# Altium PCB 液晶屏电子琴.PcbDoc
Units mil, origin at the board's own origin, x right, y up, seen from the top; angles counter-clockwise.
Board outline 6000 x 4000 mil, 2 copper layers (Top Layer, Bottom Layer); 28 components, 33 nets, 140 pads, 0 vias.
Unrouted connection lines stored in the file: 10.
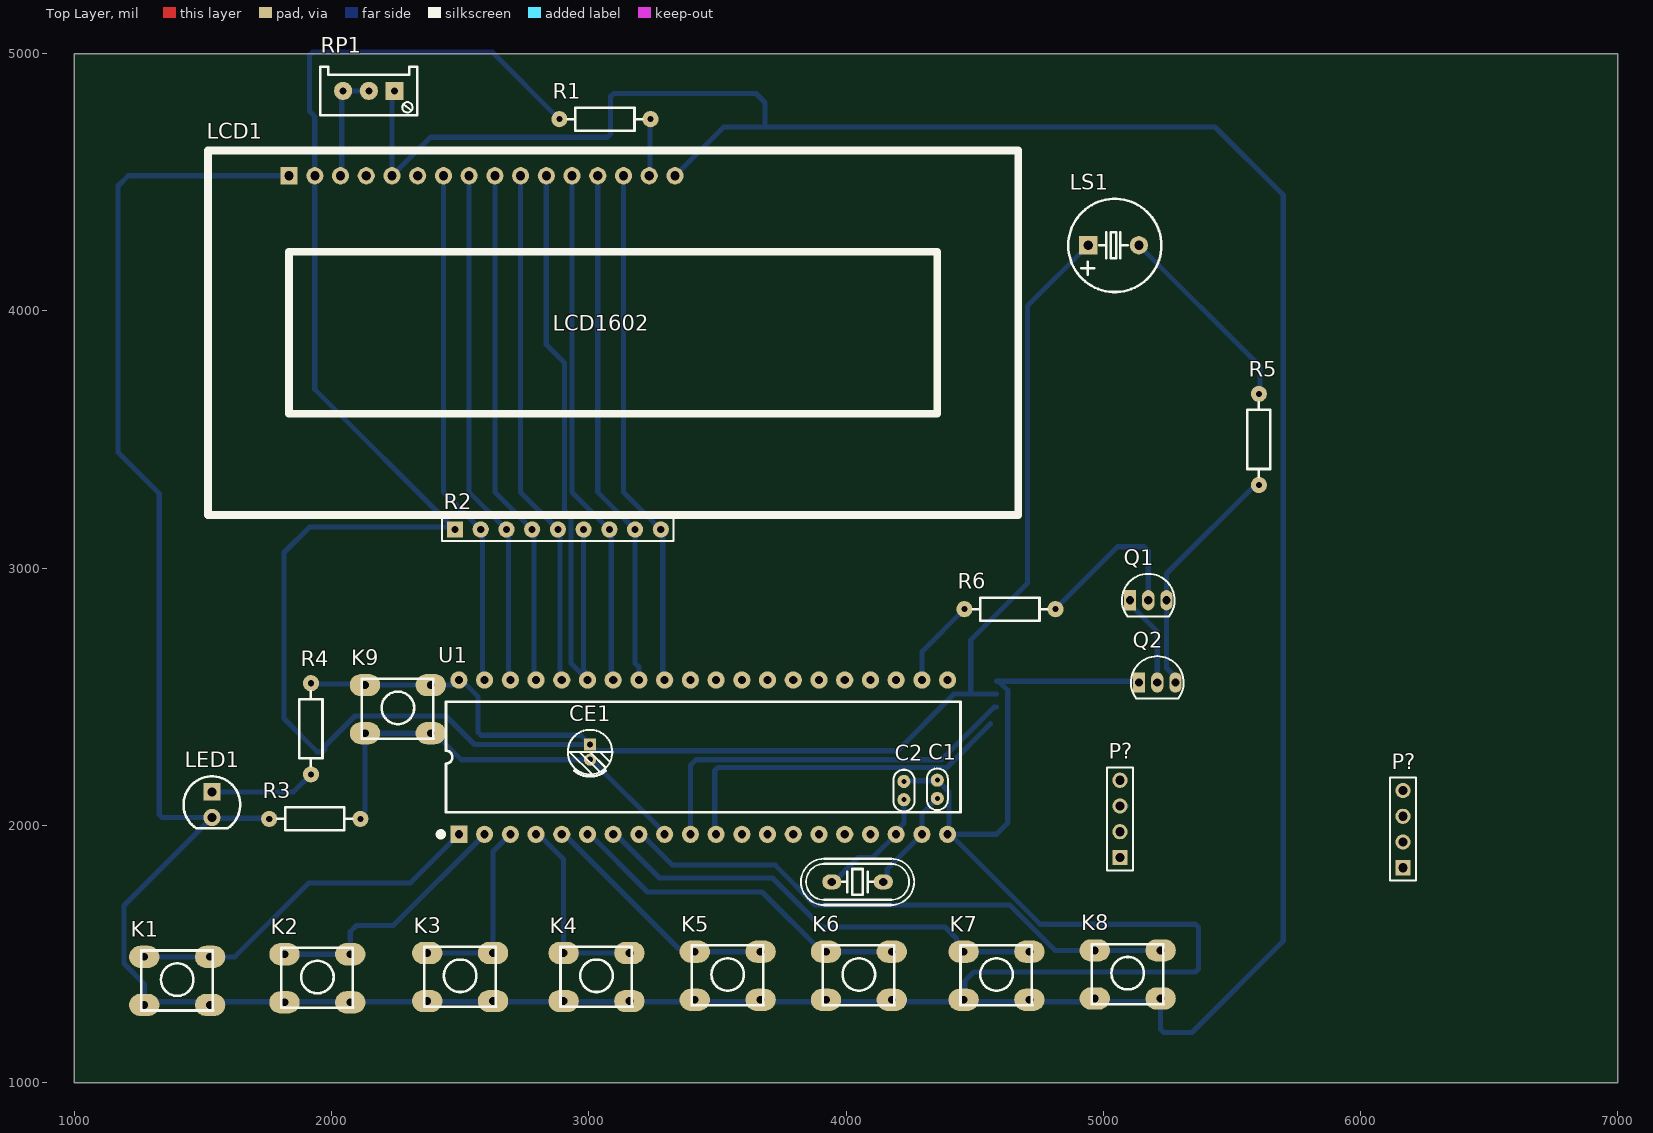
[diagram p0: Top Layer view]
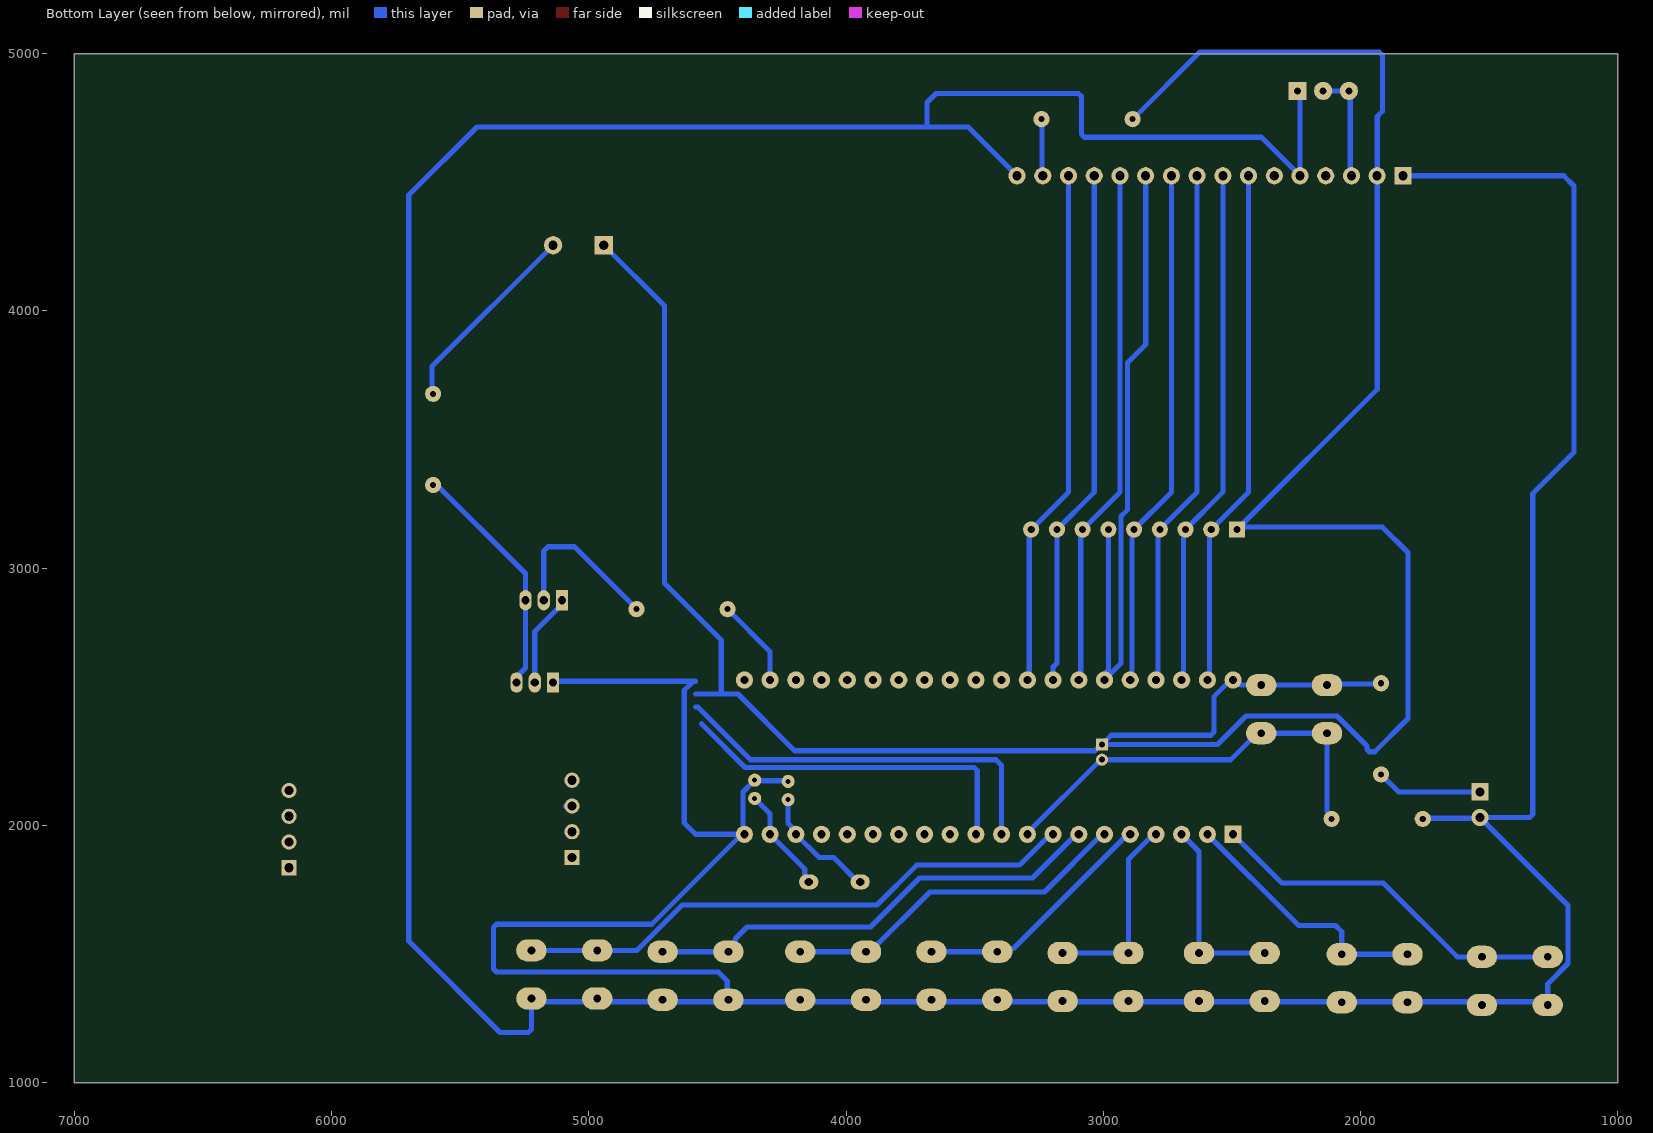
[diagram p1: Bottom Layer view, seen from below]
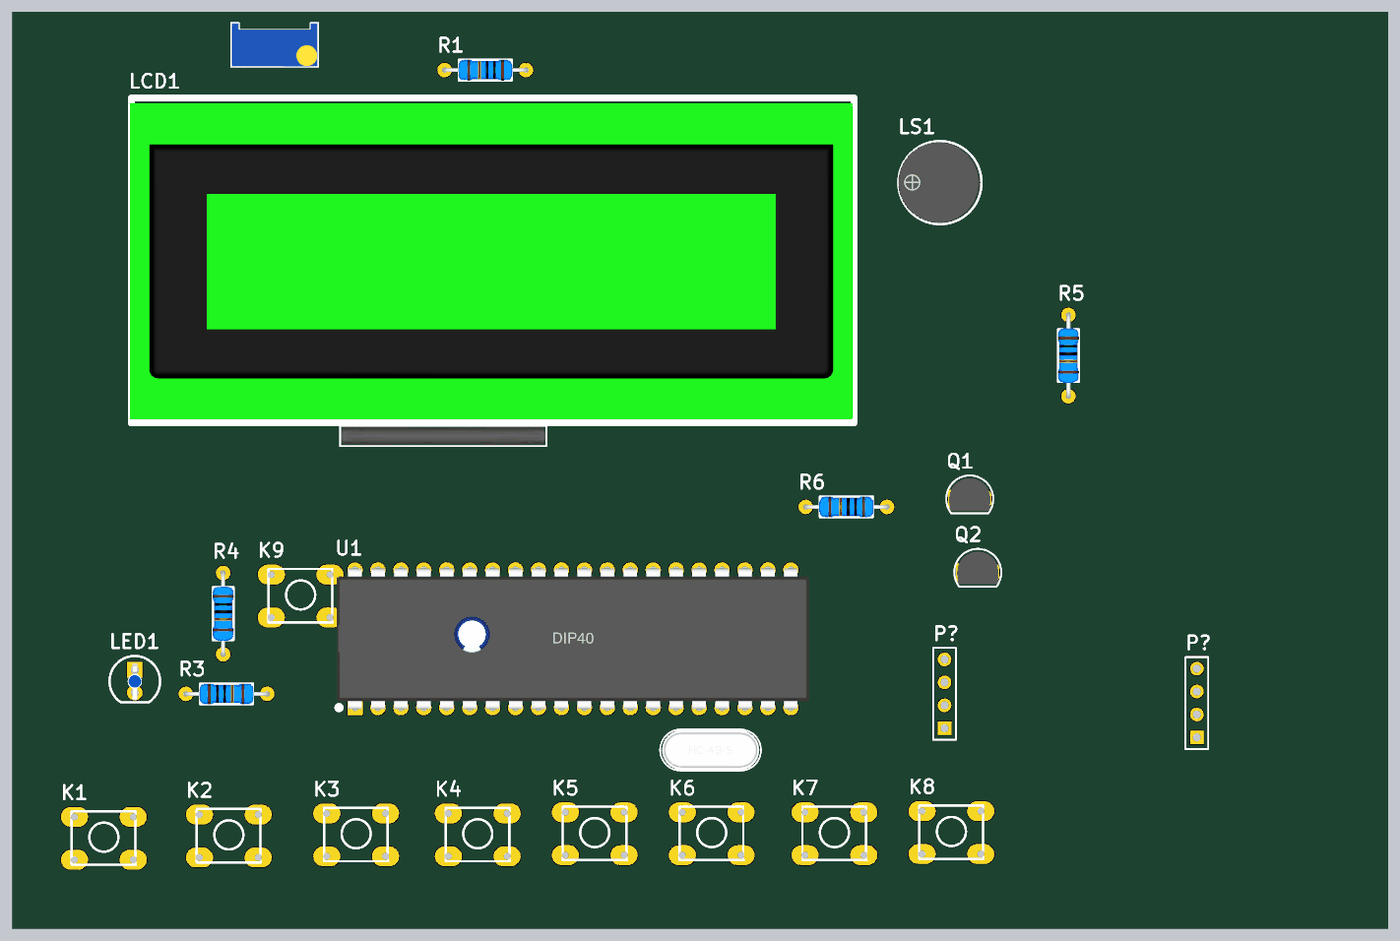
[diagram p2: 3D render of the assembled board from above, using the file's embedded part models]

## Layer stack, top to bottom
Top Solder: solder mask 0.4, Solder Resist, Dk 3.5
Top Layer: signal copper 1.4
Dielectric 1: dielectric 12.6, FR-4, Dk 4.8
Bottom Layer: signal copper 1.4
Bottom Solder: solder mask 0.4, Solder Resist, Dk 3.5

## Board outline
1000,1000 7000,1000 7000,5000 1000,5000

## Design rules (kind name [scope] priority, off if disabled: settings)
Clearance [All] p1: gap=10 ignorepadtopadclearanceinfootprint=FALSE except(0: Arc-Hole Track-Hole SMDPad-Hole THPad-Hole Via-Hole Fill-Hole Poly-Hole Region-Hole Text-Hole)
PolygonConnect [All] p1: connectstyle=Relief reliefconductorwidth=10 reliefentries=4 polygonreliefangle="90 Angle" airgapwidth=10
RoutingVias [All] p1: holewidth=28 width=50 viastyle="Through Hole" minholewidth=28 minwidth=50 maxholewidth=28 maxwidth=50
SolderMaskExpansion [All] p1: expansion=4 istentingtop=FALSE
Width [All] p1: maxlimit=20 minlimit=20 preferedwidth=20 minimp=50.000000 maximp=50.000000 favimp=50.000000
30 further rules are at their usual default settings.

## Classes and differential pairs
component class 液晶屏电子琴: C1 C2 CE1 K1 K2 K3 K4 K5 K6 K7 K8 K9 LCD1 LED1 LS1 P? Q1 Q2 R1 R2 R3 R4 R5 R6 RP1

## Components (designator, comment, footprint, x,y, rotation, side; value= is the part's Value field where it differs from the comment)
C1 "30" "CC 1.8*3.6" 4355,2140 r270 top
C2 "30" "CC 1.8*3.6" 4225,2135 r270 top
CE1 "10uF/16V" "CAP 1.5*4*8" 3005,2284.53 r270 top
K1 "KEY" SW1 1400,1400 r0 top
K2 "KEY" SW1 1945,1410 r0 top
K3 "KEY" SW1 2500,1415 r0 top
K4 "KEY" SW1 3030,1415 r0 top
K5 "KEY" SW1 3540,1420 r0 top
K6 "KEY" SW1 4050,1420 r0 top
K7 "KEY" SW1 4585,1420 r0 top
K8 "KEY" SW1 5095,1425 r0 top
K9 "KEY" SW1 2257.95,2456.42 r0 top
LCD1 "LCD 1602" LCD-1602 1835,4525 r0 top
LED1 "红色" "LED 5MM-B" 1535,2080 r270 top
LS1 "DC5V" "BEEP 5x9x5.5" 5040,4255 r270 top
P? "Header 4" HDR1X4 5065,1875 r90 top
P? "Header 4" HDR1X4 6165,1835 r90 top
Q1 "SS8050" TO92A 5175,2875 r270 top
Q2 "SS8050" TO92A 5210,2555 r270 top
R1 "10K" "RS 1/4W" 3062.83,4745 r180 top
R2 "103" "R SIP9-2.54" 2880,3150 r0 top
R3 "1K" "RS 1/4W" 1935,2025 r0 top
R4 "1K" "RS 1/4W" 1920,2375 r270 top
R5 "30" "RS 1/4W" 5605,3500 r270 top
R6 "10K" "RS 1/4W" 4637.17,2840 r180 top
RP1 "10K" 3296W 2145,4855 r180 top
U1 "STC89C52RC" DIP40-600 3445,2265 r90 top
? "12.0000M" HC-49S 3945,1780 r0 top

## Footprints (in the part's own frame and the unit in brackets; to place one, negate y for a bottom-side part, rotate by r counter-clockwise, add the part's x,y. Pads: shape width x height; smd on the part's side, far side on the other; paste and mask are expansions set on the pad)
3296W [mm] "Precise Multi-Winding Adjustable Resistor"
  rect 1.8x1.8 hole 0.7: 1(-2.54,0)
  round 1.8 hole 0.7: 2(0,0) 3(2.54,0)
  silkscreen extent -4.8,-2.4 4.8,2.4, body extent -4.75,-2.4 4.75,2.4, height 11.52
"BEEP 5x9x5.5" [mm] "5*9*5.5mm(脚距,直径,高度)"
  rect 1.8x1.8 hole 0.9: 1(0,-2.5)
  round 1.8 hole 0.9: 2(0,2.5)
  silkscreen extent -4.57,-4.47 4.62,4.73, body extent -4.5,-4.5 4.5,4.5, height 5.45
"CAP 1.5*4*8" [mm] "脚距1.5mm直径4mm高度8mm"
  rect 1.2x1.2 hole 0.6: 1(-0.75,0)
  round 1.2 hole 0.6: 2(0.75,0)
  silkscreen extent -2.2,-2.2 2.41,2.2, body extent -2,-2 2.02,2, height 8.04
"CC 1.8*3.6" [mm] "脚距1.8mm直径3.6mm"
  round 1.3 hole 0.5: 1(-0.9,0) 2(0.9,0)
  silkscreen extent -2.05,-1.04 2.05,1.04, body extent -1.8,-0.8 1.8,0.8, height 3.6
DIP40-600 [mm] "52*15.2*4mm(长宽高)"
  rect 1.7x1.7 hole 0.8: 1(-7.62,24.13)
  round 1.7 hole 0.8: 2(-7.62,21.59) 3(-7.62,19.05) 4(-7.62,16.51) 5(-7.62,13.97) 6(-7.62,11.43) 7(-7.62,8.89) 8(-7.62,6.35) 9(-7.62,3.81) 10(-7.62,1.27) 11(-7.62,-1.27) 12(-7.62,-3.81) 13(-7.62,-6.35) 14(-7.62,-8.89) 15(-7.62,-11.43) 16(-7.62,-13.97) 17(-7.62,-16.51) 18(-7.62,-19.05) 19(-7.62,-21.59) 20(-7.62,-24.13) 21(7.62,-24.13) 22(7.62,-21.59) 23(7.62,-19.05) 24(7.62,-16.51) 25(7.62,-13.97) 26(7.62,-11.43) 27(7.62,-8.89) 28(7.62,-6.35) 29(7.62,-3.81) 30(7.62,-1.27) 31(7.62,1.27) 32(7.62,3.81) 33(7.62,6.35) 34(7.62,8.89) 35(7.62,11.43) 36(7.62,13.97) 37(7.62,16.51) 38(7.62,19.05) 39(7.62,21.59) 40(7.62,24.13)
  silkscreen extent -7.87,-25.4 5.46,26.16, body extent -7.78,-26.18 7.78,26.18, height 4.7
HC-49S [mil]
  oval 75x59.06 hole 32: 1(0,0) 2(200,0)
  silkscreen extent -120,-90 320,90, body extent -112,-89 313,88, height 138
HDR1X4 [mm] "Connector; Header; 4 Position"
  rect 1.5x1.5 hole 0.9: 1(0,0)
  round 1.5 hole 0.9: 2(2.54,0) 3(5.08,0) 4(7.62,0)
  silkscreen extent -1.27,-1.27 8.89,1.27
LCD-1602 [mm] "LCD module 16*2 char                    @sucaita.com 素材塔"
  rect 1.7x1.7 hole 0.9: 1(0,0)
  round 1.7 hole 0.9: 2(2.54,0) 3(5.08,0) 4(7.62,0) 5(10.16,0) 6(12.7,0) 7(15.24,0) 8(17.78,0) 9(20.32,0) 10(22.86,0) 11(25.4,0) 12(27.94,0) 13(30.48,0) 14(33.02,0) 15(35.56,0) 16(38.1,0)
  silkscreen extent -8,-33.5 72,2.5, body extent -8.15,-33.11 71.85,1.89, height 9
"LED 5MM-B" [mm] "蓝色5mm直插LED"
  rect 1.7x1.7 hole 0.9: 1(-1.27,0)
  round 1.7 hole 0.9: 2(1.27,0)
  silkscreen extent -2.8,-2.8 2.33,2.8, body extent -2.85,-2.85 2.45,2.85, height 8.75
"R SIP9-2.54" [mm] "22.6mm*5mm*2.2mm(长*宽*厚)"
  rect 1.6x1.6 hole 0.7: 1(-10.16,0)
  round 1.6 hole 0.7: 2(-7.62,0) 3(-5.08,0) 4(-2.54,0) 5(0,0) 6(2.54,0) 7(5.08,0) 8(7.62,0) 9(10.16,0)
  silkscreen extent -11.43,-1.14 11.43,1.14, body extent -11.31,-0.96 11.31,0.96, height 5.2
"RS 1/4W" [mm] "直插色环电阻，脚距9mm，直径2.3mm                    @sucaita.com 素材塔"
  round 1.6 hole 0.6: 1(-4.5,0) 2(4.5,0)
  silkscreen extent -3.68,-1.14 3.68,1.14, body extent -4.72,-1.16 4.73,1.16, height 2.32
SW1 [mm]
  oval 2.999x2.2 hole 0.762: 1(-3.25,-2.5) 1(3.25,-2.5) 2(-3.25,2.25) 2(3.25,2.25)
  silkscreen extent -3.55,-3.05 3.56,2.88
TO92A [mm] "92晶体管                    @sucaita.com 素材塔"
  rect 2x1.2 hole 0.8: 1(0,-1.8)
  oval 2x1.2 hole 0.8: 2(0,0) 3(0,1.8)
  silkscreen extent -2.6,-2.6 1.6,2.6, body extent -2.3,-2.3 1.3,2.3, height 7.6

## Part data
C1 C2: library part CC, "瓷片电容", BOM名称=直插瓷片电容, 封装库来自淘宝卖家 ID：黄晶宝石=其他店铺购入均为盗版，不享受售后技术支持服务，请立即申请退款, 淘宝ID="封装库来自淘宝 ID：黄晶宝石", 联系售后=https://shop463601444.taobao.com
CE1: library part CE, "直插电解电容", BOM名称=直插电解电容, 淘宝ID="封装库来自淘宝 ID：黄晶宝石", 联系售后=https://shop463601444.taobao.com
LED1: library part LED-5MM, "直插5mm LED", BOM名称=5mm插件LED, 学习资源=https://shop463601444.taobao.com, 版权归属="封装库来自淘宝 ID：黄晶宝石"
LS1: library part BEEP, "蜂鸣器", BOM名称=蜂鸣器, 技术支持，联系售后=https://shop463601444.taobao.com, 版权归属="封装库来自淘宝 ID：黄晶宝石"
P? P?: "Header, 4-Pin", LatestRevisionDate=17-Jul-2002, LatestRevisionNote="Re-released for DXP Platform.", Publisher="Altium Limited"
Q1 Q2: library part 8050-DIP, "高频放大-NPN型", BOM名称=高频放大-NPN型, 属性="40V 1.5A 1W 100MHZ", 技术支持，联系售后=https://shop463601444.taobao.com, 版权归属="封装库来自淘宝 ID：黄晶宝石"
R1 R3 R4 R5 R6: library part R-S, "色环电阻", BOM名称=色环电阻, 版权归属="封装库来自淘宝 ID：黄晶宝石", 联系售后=https://shop463601444.taobao.com
R2: library part "R SIP9", "9脚直插排阻", BOM名称=单列直插排阻, 淘宝ID="封装库来自淘宝 ID：黄晶宝石", 联系售后=https://shop463601444.taobao.com
RP1: library part RP, "单联电位器", BOM名称=插件电位器, 版权归属="封装库来自淘宝 ID：黄晶宝石", 联系售后=https://shop463601444.taobao.com
U1: "STC单片机", BOM名称=STC单片机, 学习资源=https://shop463601444.taobao.com, 版权归属="封装库来自淘宝 ID：黄晶宝石"
?: library part XT, "晶振"
LCD1: BOM名称="LCD 1602", 技术支持，联系售后=https://shop463601444.taobao.com, 版权归属="封装库来自淘宝 ID：黄晶宝石"

## Nets (pads, with @x,y where several pads share a name; then routed paths per layer and width w, separated by ;. In a path a pad name is that pad's centre, name@x,y a point inside that pad or via, vN(x,y) a via of type N, cw(c..) or ccw(c..) an arc to the next point about the centre after c; other vN are vias at no path point)
DB0: LCD1.7 R2.2 U1.39 | length 2026.3
  Bottom Layer w20: LCD1.7 2435,3295 R2.2 2587.5,3142.5 2587.5,2572.5 U1.39
DB1: LCD1.8 R2.3 U1.38 | length 2026.3
  Bottom Layer w20: LCD1.8 2535,3295 R2.3 2687.5,3142.5 2687.5,2572.5 U1.38
DB2: LCD1.9 R2.4 U1.37 | length 2026.3
  Bottom Layer w20: LCD1.9 2635,3295 R2.4 2787.5,3142.5 2787.5,2572.5 U1.37
DB3: LCD1.10 R2.5 U1.36 | length 2026.3
  Bottom Layer w20: LCD1.10 2735,3295 R2.5 2887.5,3142.5 2887.5,2572.5 U1.36
DB4: LCD1.11 R2.6 U1.35 | length 2604.8
  Bottom Layer w20: LCD1.11 2835,3868.73 2905,3798.73 2905,3226.87 2931.5,3200.37 2931.5,2628.5 U1.35@2986.02,2573.98 ; R2.6 2980,2605 2986.02,2598.98 U1.35@2986.02,2573.98 ; U1.35 U1.35@2986.02,2573.98
DB5: LCD1.12 R2.7 U1.34 | length 2026.3
  Bottom Layer w20: LCD1.12 2935,3295 R2.7 3087.5,3142.5 3087.5,2572.5 U1.34
DB6: LCD1.13 R2.8 U1.33 | length 2026.3
  Bottom Layer w20: LCD1.13 3035,3295 R2.8 3180,2630 3195,2615 U1.33
DB7: LCD1.14 R2.9 U1.32 | length 2026.3
  Bottom Layer w20: LCD1.14 3135,3295 R2.9 3287.5,3142.5 3287.5,2572.5 U1.32
EN: LCD1.6 U1.28
GND: C1.1 C2.1 K1.1 K2.1 K3.1 K4.1 K5.1 K6.1 K7.1 K8.1 LCD1.1 LCD1.5 LCD1.16 LED1.2 P?.1@5065,1875 P?.2@6165,1935 Q2.1 R3.1 RP1.1 U1.20 | length 20823.7
  Bottom Layer w20: R3.1 1755.33,2027.5 1537.5,2027.5 LED1.2 ; LCD1.1 1210,4525 1170,4485 1170,3450 1330,3290 1330,2041.72 1341.72,2030 LED1.2 ; RP1.1 2235,4845 LCD1.5 2385,4675 3073.28,4675 3085,4686.72 3085,4833.28 3096.72,4845 3650,4845 3685,4810 3685,4720 3680,4715 ; LCD1.16 3525,4715 3680,4715 ; C2.1 4227.5,2172.93 4352.5,2172.93 C1.1 4400.59,2129.84 4400.59,1970.59 U1.20 U1.20@4405,1965 ; K7.1@4457.05,1321.57 4461.6,1326.12 4461.6,1394.88 4496.72,1430 5358.28,1430 5370,1441.72 5370,1603.28 5358.28,1615 4755,1615 U1.20@4405,1965 ; 4585,2560 4592.87,2560 ; Q2.1 5134.13,2560 4592.87,2560 ; LED1.2 1193.01,1688.01 1193.01,1462.36 1272.05,1383.32 1272.05,1301.57 1284.55,1314.07 1527.95,1314.07 1817.05,1314.07 2072.95,1314.07 2372.05,1314.07 2627.95,1314.07 2902.05,1314.07 3157.95,1314.07 3412.05,1314.07 3667.95,1314.07 3922.05,1314.07 4177.95,1314.07 4457.05,1314.07 4712.95,1314.07 4967.05,1314.07 5210.45,1314.07 5222.95,1326.57 5222.95,1207.05 5235,1195 5345,1195 5700,1550 5700,4450 5435,4715 3680,4715 ; U1.20@4405,1965 4585,1965 4628.62,2008.62 4628.62,2524.81 4607.68,2545.75 4607.13,2545.75 4592.87,2560
NetLCD1_3: LCD1.3 RP1.2 RP1.3 | length 434.1
  Bottom Layer w20: LCD1.3 2040,4530 2040,4850 RP1.3 RP1.2
NetLCD1_15: LCD1.15 R1.1 | length 222.1
  Bottom Layer w20: LCD1.15 3237.5,4527.5 3237.5,4742.5 R1.1
NetLED1_1: LED1.1 R4.2 | length 413.1
  Bottom Layer w20: LED1.1 1852.17,2130 R4.2
NetLS1_2: LS1.2 R5.1 | length 753.2
  Bottom Layer w20: LS1.2 5610,3783.43 R5.1@5610,3697.17
NetQ1_1: Q1.1 Q2.2 | length 363.9
  Bottom Layer w20: Q1.1 5104.13,2859.25 5210,2753.39 Q2.2
NetQ1_2: Q1.2 R6.1 | length 654.4
  Bottom Layer w20: R6.1@4817.17,2845 5055,3082.83 5158.28,3082.83 5175,3066.12 Q1.2
NetQ1_3: Q1.3 Q2.3 R5.2 | length 953.2
  Bottom Layer w20: Q2.3 5280.87,2576.58 5245.87,2611.58 Q1.3 5245.87,2978.7 R5.2@5610,3342.83
P1.0: K1.2 U1.1 | length 1427.4
  Bottom Layer w20: K1.2@1272.05,1488.58 1527.95,1488.58 1623.58,1488.58 1910,1775 2305,1775 U1.1@2500,1970
P1.1: K2.2 U1.2 | length 1029.6
  Bottom Layer w20: K2.2@1817.05,1498.58 2072.95,1498.58 2072.95,1586.24 2096.72,1610 2240,1610 U1.2@2600,1970
P1.2: K3.2 U1.3 | length 752.2
  Bottom Layer w20: K3.2@2372.05,1503.58 2627.95,1503.58 2627.95,1897.95 U1.3@2700,1970
P1.3: K4.2 U1.4 | length 764.6
  Bottom Layer w20: U1.4@2800,1970 2902.05,1867.95 2902.05,1503.58 K4.2@3157.95,1503.58
P1.4: K5.2 U1.5 | length 959.1
  Bottom Layer w20: U1.5@2900,1970 3348.67,1521.33 3399.3,1521.33 3412.05,1508.58 K5.2@3667.95,1508.58
P1.5: K6.2 U1.6 | length 1369.1
  Bottom Layer w20: U1.6@3000,1970 3228.83,1741.17 3673.73,1741.17 3906.32,1508.58 3922.05,1508.58 K6.2@4177.95,1508.58
P1.6: K7.2 U1.7 | length 1818.4
  Bottom Layer w20: U1.7@3100,1970 3274.49,1795.51 3714.49,1795.51 3905,1605 4385,1605 4430,1560 4430,1535.63 4457.05,1508.58 K7.2@4712.95,1508.58
P1.7: K8.2 U1.8 | length 2212
  Bottom Layer w20: U1.8@3200,1970 3325,1845 3725,1845 3880,1690 4636.79,1690 4813.21,1513.58 4967.05,1513.58 K8.2@5222.95,1513.58
P2.1: R6.2 U1.22 | length 343.3
  Bottom Layer w20: U1.22 4295,2675 R6.2
P3.0: P?.3@6165,2035 P?.4@5065,2175 U1.10 | length 1552.2
  Bottom Layer w20: U1.10 3395,2233.28 3416.72,2255 4371.57,2255 4576.57,2460 4585,2460
P3.1: P?.3@5065,2075 P?.4@6165,2135 U1.11 | length 1426.8
  Bottom Layer w20: U1.11 3490,1970 3490,2213.28 3501.72,2225 4392.13,2225 4562.13,2395 ; P?.3@5067.13,2060 5075,2060 P?.3@5090,2075
RES: CE1.2 K9.1 R3.2 U1.9 | length 1671.1
  Bottom Layer w20: R3.2 2112.17,2036.63 2130,2054.47 2130,2357.99 2385.91,2357.99 2401.63,2357.99 2504.63,2255 CE1.2 3010,2255 3295,1970 U1.9@3300,1970
RS: LCD1.4 U1.27
VCC: CE1.1 K9.2 LCD1.2 LS1.1 P?.1@6165,1835 P?.2@5065,1975 R1.2 R2.1 R4.1 U1.40 | length 10757.5
  Bottom Layer w20: R4.1 1923.58,2548.58 2126.42,2548.58 2130,2545 2385.91,2545 2466.61,2545 2491.61,2570 2500,2570 2570,2500 2570,2361.72 2581.72,2350 2969.06,2350 CE1.1 ; R2.1 R2.1@2470,3160 ; R1.2 2625.67,5005 1926.72,5005 1915,4993.28 1915,4775.49 1935,4755.49 LCD1.2 1935,3695 R2.1@2470,3160 ; 4585,2510 4485,2510 ; LS1.1 4705,4018.43 4705,2940 4485,2720 4485,2510 ; R2.1@2470,3160 1915,3160 1815,3060 1815,2415 1944.37,2285.63 1965.63,2285.63 1975,2295 1975,2308.25 2091.75,2425 2445,2425 2555.94,2314.06 CE1.1 ; CE1.1 3018.62,2300.43 3021.26,2300.43 3031.69,2290 4200,2290 4420,2510 4485,2510
XTAL1: ?.2 C1.2 U1.19 | length 411.6
  Bottom Layer w20: ?.2 4160.45,1795.45 4160.45,1830.45 U1.19 4295,2044.57 C1.2
XTAL2: ?.1 C2.2 U1.18 | length 473.6
  Bottom Layer w20: ?.1 3952.97,1780 4047.22,1874.25 4104.25,1874.25 U1.18 4195,1977.7 4225,2007.7 C2.2
pads on no net: U1.12 U1.13 U1.14 U1.15 U1.16 U1.17 U1.21 U1.23 U1.24 U1.25 U1.26 U1.29 U1.30 U1.31

## Text inside footprints (layer, text, board x,y; h text height)
LCD1: Top Overlay "LCD1602" at 2860.04,3923.43 h60